# Allegro board FPMEMORY.brd
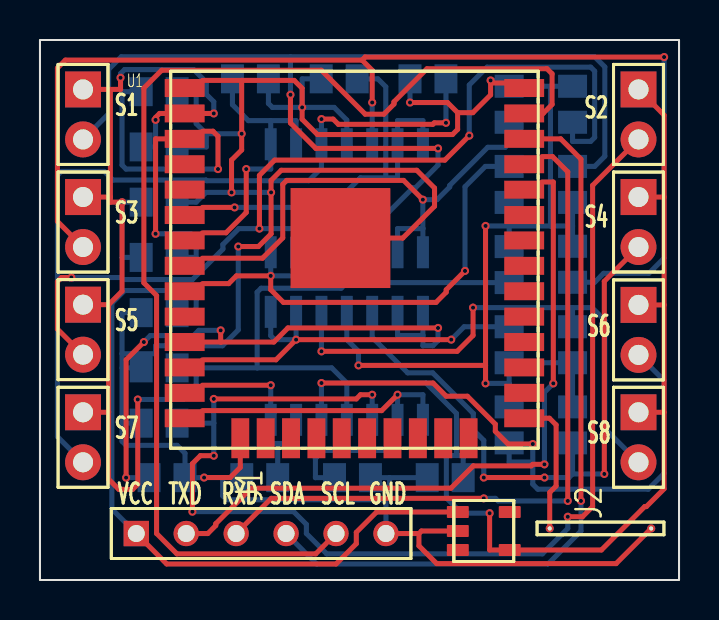
[diagram p0: board, top side]
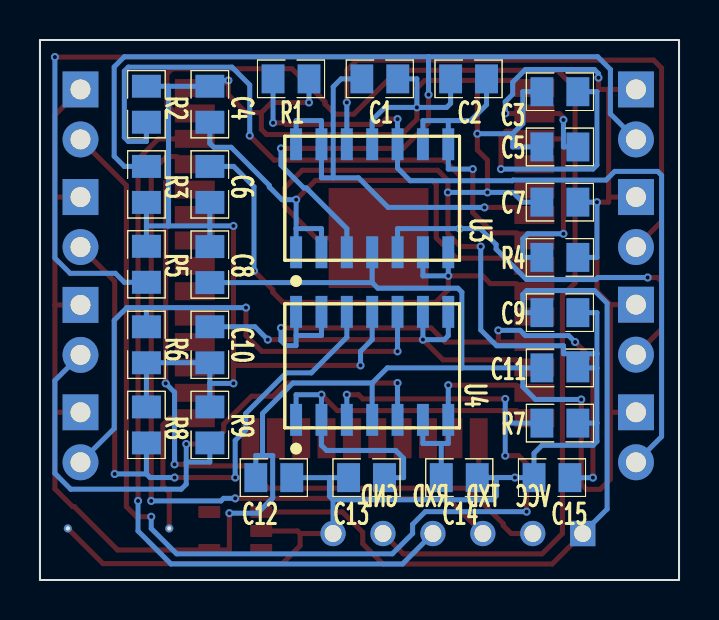
[diagram p1: board, bottom side, seen from below]

Outline 32 x 27 mm; copper layers: TOP, BOTTOM. Coordinates in mm from the lower left corner of the outline.
Outline path: rectangle 0,0 32,27

## Design rules (mm)
constraint set DEFAULT: min track width 0.254, pair gap 0.254

## Placement (name value [footprint] x y rotation side)
C1  0.1uF  [CAP0805]  14.98 25.06 0 bottom
C2  0.1uF  [CAP0805]  10.54 25.06 0 bottom
C3  0.1uF  [CAP0805]  5.97 24.42 180 bottom
C4  0.1uF  [CAP0805]  23.49 23.79 270 bottom
C5  10uF  [CAP0805]  5.97 21.65 180 bottom
C6  0.1uF  [CAP0805]  23.49 19.78 270 bottom
C7  0.1uF  [CAP0805]  5.97 18.89 180 bottom
C8  0.1uF  [CAP0805]  23.49 15.77 90 bottom
C9  1uF  [CAP0805]  5.97 13.37 180 bottom
C10  0.1uF  [CAP0805]  23.49 11.76 270 bottom
C11  2.2uF  [CAP0805]  5.97 10.61 180 bottom
C12  0.1uF  [CAP0805]  20.29 5.12 180 bottom
C13  0.1uF  [CAP0805]  15.65 5.12 180 bottom
C14  0.1uF  [CAP0805]  11 5.12 180 bottom
C15  0.1uF  [CAP0805]  6.36 5.12 180 bottom
J1  UART  [SIP-6]  4.82 2.32 90 top
J2  CON2  [SIP-2S]  25.52 2.58 90 top
R1  50k  [RES0805]  19.43 25.06 180 bottom
R2  50k  [RES0805]  26.67 23.79 270 bottom
R3  50k  [RES0805]  26.67 19.78 270 bottom
R4  10k  [RES0805]  5.97 16.13 180 bottom
R5  50k  [RES0805]  26.67 15.79 90 bottom
R6  50k  [RES0805]  26.67 11.76 270 bottom
R7  50k  [RES0805]  5.97 7.84 180 bottom
R8  50k  [RES0805]  26.67 7.75 90 bottom
R9  50k  [RES0805]  23.49 7.75 270 bottom
S1  IMS-C20B  [SIP-2]  2.16 24.53 0 top
S2  IMS-C20B  [SIP-2]  29.97 24.53 0 top
S3  IMS-C20B  [SIP-2]  2.16 19.15 0 top
S4  IMS-C20B  [SIP-2]  29.97 19.15 0 top
S5  IMS-C20B  [SIP-2]  2.16 13.77 0 top
S6  IMS-C20B  [SIP-2]  29.97 13.75 0 top
S7  IMS-C20B  [SIP-2]  2.16 8.39 0 top
S8  IMS-C20B  [SIP-2]  29.97 8.39 0 top
U1  ESP32  [SMD-38]  15.75 19.09 0 top
U2  TPS70933  [SOT-23]  22.22 2.45 0 top
U3  LM324  [SOIC-14]  15.36 19.09 90 bottom
U4  LM324  [SOIC-14]  15.36 10.71 90 bottom

## Library data of the parts
C1-C15 = CAP NP
J1 = UART
J2 = CON2
R1-R9 = R
S1-S8 = IMS-C20B
U1 = ESP32
U2 = TPS70933
U3 U4 = LM324

## Footprints (pads in the part's own frame, mm; a bottom-side part is the same pattern mirrored in y, then rotated)
CAP0805
  rect 1.15x1.45 smd: 1(-0.9,0) 2(0.9,0)
RES0805
  rect 1.15x1.45 smd: 1(-0.9,0) 2(0.9,0)
SIP-2
  rect 1.8x1.8 hole 1: 1(0,0)
  round 1.8 hole 1: 2(0,-2.5)
SIP-2S
  round 0.406 hole 0.203: 1(0,0) 2(0,-5.08)
SIP-6
  rect 1.27x1.27 hole 0.85: 1(0,0)
  round 1.27 hole 0.85: 2(0,-2.5) 3(0,-5) 4(0,-7.5) 5(0,-10) 6(0,-12.5)
SMD-38
  rect 2x0.9 smd: 1(-8.5,5.51) 2(-8.5,4.24) 3(-8.5,2.97) 4(-8.5,1.7) 5(-8.5,0.43) 6(-8.5,-0.84) 7(-8.5,-2.11) 8(-8.5,-3.38) 9(-8.5,-4.65) 10(-8.5,-5.92) 11(-8.5,-7.19) 12(-8.5,-8.46) 13(-8.5,-9.73) 14(-8.5,-11) 25(8.5,-11) 26(8.5,-9.73) 27(8.5,-8.46) 28(8.5,-7.19) 29(8.5,-5.92) 30(8.5,-4.65) 31(8.5,-3.38) 32(8.5,-2.11) 33(8.5,-0.84) 34(8.5,0.43) 35(8.5,1.7) 36(8.5,2.97) 37(8.5,4.24) 38(8.5,5.51)
  rect 0.9x2 smd: 15(-5.715,-12) 16(-4.445,-12) 17(-3.175,-12) 18(-1.905,-12) 19(-0.635,-12) 20(0.635,-12) 21(1.905,-12) 22(3.175,-12) 23(4.445,-12) 24(5.715,-12)
  rect 5x5 smd: 39(-0.7,-1.99)
SOIC-14
  rect 1.6x0.6 smd: 1(-2.7,3.81) 2(-2.7,2.54) 3(-2.7,1.27) 4(-2.7,0) 5(-2.7,-1.27) 6(-2.7,-2.54) 7(-2.7,-3.81) 8(2.7,-3.81) 9(2.7,-2.54) 10(2.7,-1.27) 11(2.7,0) 12(2.7,1.27) 13(2.7,2.54) 14(2.7,3.81)
SOT-23
  rrect 1.1x0.6 smd: 1(-1.3,0.95) 2(-1.3,0) 3(-1.3,-0.95) 4(1.3,-0.95) 5(1.3,0.95)

## Nets
GND: C1.1 C2.2 C3.1 C4.1 C5.1 C6.2 C7.1 C8.2 C9.2 C10.2 C11.2 C12.2 C13.1 C14.2 C15.1 J1.6 J2.2(P2) R1.2 R2.1 R3.2 R5.2 R6.2 R7.2 R8.2 R9.1 U1.1 U1.15 U1.38 U1.39 U2.2 U3.11 U4.11
VCC: C9.1 J1.1(VCC) U2.1
VDD33: C5.2 C7.2 C8.1 C11.1 C12.1 R4.2 S1.1 S2.1 S3.1 S4.1 S5.1 S6.1 S7.1 S8.1 U1.2 U2.4(OUT) U3.4(VCC) U4.4(VCC)
ADC1_CH4: C4.2 U1.8 U3.1 U3.2
ADC1_CH5: C6.1 U1.9 U3.6 U3.7
ADC1_CH6: C1.2 U1.6 U3.13 U3.14
ADC1_CH7: C2.1 U1.7 U3.8 U3.9
ADC2_CH5: C13.2 U1.14 U4.1 U4.2
ADC2_CH6: C14.1 U1.13 U4.6 U4.7
ADC2_CH7: C10.1 U1.12 U4.8 U4.9
ADC2_CH9: C15.2 U1.11 U4.13 U4.14
RXD: J1.3 U1.35(TXD0)
SCL: J1.5 U1.37
SDA: J1.4 U1.36
TXD: J1.2 U1.34
N01133: R3.1 S1.2(-) U3.3
N02072: R2.2 S5.2(-) U3.5
N02980: R5.1 S3.2(-) U3.12
N03024: R1.1 S7.2(-) U3.10
N05883: C3.2 R4.1 U1.3
N05919: J2.1 U1.25
N44841: R7.1 S2.2(-) U4.3
N44913: R8.1 S4.2(-) U4.12
N45127: R9.2 S6.2(-) U4.5
N45143: R6.1 S8.2(-) U4.10

Pads without a net: U1 4 5 10 16 17 18 19 20 21 22 23 24 26 27 28 29 30 31 32 33; U2 3 5

## Via types
v1: diameter 0.406, hole 0.203, TOP to BOTTOM, 58 vias

## Routing (per net, layer and track width the routed paths; a pad name or vN(x,y) marks a point on that pad's centre or on a via; arc(x,y) is an arc through that point)
GND: length 179.7
  TOP w0.254: 18.98,2.32 19.1,2.45 U2.2 ; 18.98,2.32 18.98,1.71 19.86,0.82 28.85,0.82 J2.2 ; 18.98,2.32 J1.6 ; 20.91,23.37 20.91,22.53 20.66,22.27 13.89,22.27 13.13,23.04 v1(13.13,23.63) 13.13,24.58 12.73,24.98 10.1,24.98 ; 20.91,23.37 20.41,23.87 v1(18.53,23.87) ; 20.91,23.37 21.68,23.37 22.56,24.26 22.56,24.85 ; 22.31,10.73 v1(22.31,9.83) ; 22.31,10.73 v1(15.95,10.73) ; 22.31,10.73 v1(22.31,17.7) ; U1.38 24.25,24.85 22.56,24.85 ; 10.1,24.98 v1(10.1,22.31) 10.1,21.5 9.59,21 v1(9.59,19.38) ; 10.1,24.98 8.13,24.98 ; 22.56,24.85 v1(22.56,24.98) ; U1.15 10.03,5.63 9.52,5.12 v1(8.22,5.12) ; U1.39 18.17,17.1 19.76,18.69 19.76,19.6 18.87,20.49 12.08,20.49 11.57,19.98 v1(11.57,19.38) 11.57,17.31 10.94,16.67 v1(9.93,16.67)
  BOTTOM w0.254: 4.11,10.61 4.11,11.31 ; 4.11,10.61 4.11,7.84 ; 4.11,10.61 C11.2 ; 4.11,11.31 5.79,11.31 5.79,11.71 9.14,11.71 9.93,12.51 v1(9.93,16.67) ; 4.11,11.31 4.11,13.37 C9.2 ; 17.32,4.01 9.35,4.01 9.15,4.21 9.15,5.12 ; 17.32,4.01 J1.6 ; 17.32,4.01 17.5,4.19 17.5,5.12 ; 25.56,24.69 25.56,17.7 ; 25.56,24.69 R2.1 ; 25.56,24.69 C4.1 23.49,24.98 v1(22.56,24.98) ; 25.56,17.7 23.49,17.7 ; 25.56,17.7 26.67,17.7 ; 23.49,9.83 R9.1 ; 23.49,9.83 v1(22.31,9.83) ; 23.49,9.83 C10.2 R6.2 R8.2 ; v1(13.13,23.63) 11.64,23.63 11.44,23.83 C2.2 ; v1(13.13,23.63) 13.13,25.06 C1.1 ; v1(13.13,23.63) 14.73,23.63 15.36,22.99 15.36,21.79 ; 8.33,22.31 7.82,22.82 7.82,24.42 C3.1 ; 8.33,22.31 8.33,21.65 C5.1 ; 8.33,22.31 v1(10.1,22.31) ; 15.36,13.41 15.36,12.02 15.95,11.43 v1(15.95,10.73) ; C6.2 23.49,17.7 ; 23.49,17.7 C8.2 ; 23.49,17.7 v1(22.31,17.7) ; 9.15,5.12 9.14,5.12 v1(8.22,5.12) 8.02,5.12 8.01,5.12 C15.1 7.26,6.34 6.86,6.73 4.31,6.73 4.11,6.93 4.11,7.84 ; 9.15,5.12 C14.2 ; C7.1 7.82,18.89 8.31,19.38 v1(9.59,19.38) v1(11.57,19.38) ; 26.67,17.7 R5.2 ; 26.67,17.7 R3.2 ; 17.5,5.12 C12.2 ; 17.5,5.12 C13.1 ; 4.11,7.84 R7.2 ; R1.2 v1(18.53,23.87)
VCC: length 36.6
  TOP w0.254: J1.1 6.35,0.8 14.82,0.8 15.84,1.82 15.84,2.39 16.86,3.4 U2.1
  BOTTOM w0.254: J1.1 3.6,3.55 3.6,13.84 4.24,14.47 7.62,14.47 7.82,14.28 7.82,13.37 C9.1
VDD33: length 133.1
  TOP w0.254: S3.1 3.53,19.15 ; 3.53,19.15 3.53,18.89 v1(4.11,18.89) 4.11,14.44 3.44,13.77 ; 3.53,19.15 3.53,24.53 ; 31.25,19.15 31.25,23.25 S2.1 ; 31.25,19.15 S4.1 ; 31.25,19.15 31.25,13.75 ; 3.44,13.77 3.44,8.39 ; 3.44,13.77 S5.1 ; v1(4.03,25.11) 4.03,24.53 3.53,24.53 ; v1(8.7,23.33) U1.2 5.99,23.33 5.79,23.12 v1(5.79,23.01) ; S7.1 3.44,8.39 ; 3.44,8.39 3.44,5.04 3.95,4.53 4.64,4.53 4.9,4.79 v1(4.9,9.03) ; S6.1 31.25,13.75 ; 31.25,13.75 31.25,8.39 ; 3.53,24.53 S1.1 ; v1(22.51,3.34) 22.51,1.5 U2.4 28.11,1.5 30.28,3.67 30.36,3.67 31.25,4.56 31.25,8.39 ; 31.25,8.39 S8.1
  BOTTOM w0.254: C5.2 5.79,21.65 v1(5.79,23.01) ; C11.1 7.82,10.61 ; 7.82,10.61 7.82,9.66 7.19,9.03 v1(4.9,9.03) ; 7.82,10.61 10.87,10.61 ; C8.1 15.36,14.87 ; 15.36,14.87 U3.4 ; 15.36,14.87 15.08,14.59 11.07,14.59 10.87,14.39 10.87,10.61 ; 20.85,6.22 20.85,8.32 19.33,9.85 15.36,9.85 ; 20.85,6.22 20.35,6.22 20.35,4.1 21.11,3.34 v1(22.51,3.34) ; 20.85,6.22 21.19,6.22 C12.1 ; v1(8.7,23.33) 8.7,23.91 8.33,24.28 8.33,24.89 7.7,25.52 4.24,25.52 4.03,25.32 v1(4.03,25.11) ; 15.36,9.85 14.61,10.61 10.87,10.61 ; 15.36,9.85 U4.4 ; C7.2 v1(4.11,18.89) 4.11,16.13 R4.2
ADC1_CH4: length 26.3
  TOP w0.254: v1(19.17,19.02) 18.21,19.98 12.36,19.98 12.16,19.78 12.16,17.11 11.14,16.09 8.13,16.09
  BOTTOM w0.254: C4.2 23.49,21.83 23.29,21.63 22.42,21.63 20.52,19.73 20.52,19.65 19.88,19.02 v1(19.17,19.02) 19.17,17.57 ; U3.1 19.17,17.57 19.17,17.57 ; 19.17,17.57 17.9,17.57 U3.2
ADC1_CH5: length 25.5
  TOP w0.254: 8.13,14.82 9.45,14.82 9.84,15.21 v1(11.55,15.21) 11.55,14.52 12.19,13.88 19.83,13.88 20.34,14.39 20.34,14.51 v1(21.28,15.46)
  BOTTOM w0.254: C6.1 22.3,20.68 21.28,19.66 v1(21.28,15.46) ; U3.6 12.82,15.21 v1(11.55,15.21) U3.7
ADC1_CH6: length 21.8
  TOP w0.254: v1(9.74,18.63) 8.13,18.63
  BOTTOM w0.254: C1.2 16.92,25.06 17.32,24.66 17.32,20.11 ; 17.32,20.11 17.9,20.11 17.9,22.97 19.17,22.97 U3.14 ; 17.32,20.11 16.05,20.11 14.57,18.63 v1(9.74,18.63)
ADC1_CH7: length 14.4
  TOP w0.254: 8.13,17.36 9.31,17.36 10.33,18.38 v1(10.33,20.55)
  BOTTOM w0.254: 11.55,22.97 12.82,22.97 U3.9 ; 11.55,22.97 U3.8 11.55,20.55 v1(10.33,20.55) ; 11.55,22.97 10.43,22.97 9.64,23.76 C2.1
ADC2_CH5: length 21.5
  TOP w0.254: v1(17.9,9.26) 17.11,8.47 8.13,8.47
  BOTTOM w0.254: C13.2 13.79,5.12 13.79,6.08 14.19,6.48 17.65,6.48 17.9,6.73 U4.2 v1(17.9,9.26) 19.17,9.26 U4.1
ADC2_CH6: length 10.5
  TOP w0.254: v1(11.55,9.74) 8.13,9.74
  BOTTOM w0.254: 11.9,6.83 12.82,6.83 U4.6 ; 11.9,6.83 11.55,6.83 U4.7 v1(11.55,9.74) ; 11.9,6.83 C14.1
ADC2_CH7: length 20
  TOP w0.254: v1(20.59,12.02) v1(12.82,12.02) 11.82,11.01 8.13,11.01
  BOTTOM w0.254: U4.9 v1(12.82,12.02) 11.75,12.02 11.55,12.22 U4.8 ; C10.1 21.24,12.66 v1(20.59,12.02)
ADC2_CH9: length 31.6
  TOP w0.254: 9.05,11.9 v1(9.05,12.48) ; 9.05,11.9 U1.11 ; 9.05,11.9 11.71,11.9 12.42,12.6 v1(19.93,12.6) ; v1(5.2,11.9) 4.31,11.01 v1(4.31,5.12)
  BOTTOM w0.254: v1(19.93,12.6) 19.93,11.97 19.68,11.72 19.17,11.72 19.17,12.23 ; 19.17,12.23 17.9,12.23 17.9,13.41 ; 19.17,12.23 U4.14 ; v1(9.05,12.48) 7.95,12.48 7.69,12.22 5.52,12.22 v1(5.2,11.9) ; C15.2 v1(4.31,5.12)
RXD: length 35.4
  TOP w0.254: J1.3 11.58,4.08 v1(22.22,4.08) ; 25.14,21.17 25.67,21.17 26.43,20.41 v1(26.43,3.95)
  BOTTOM w0.254: v1(26.43,3.95) 22.93,3.95 22.81,4.08 v1(22.22,4.08)
SCL: length 58.3
  TOP w0.254: J1.5 13.81,1.31 6.86,1.31 5.84,2.32 5.84,14.22 5.2,14.86 5.2,24.6 6.09,25.49 14.09,25.49 16.29,23.29 17.22,23.29 17.73,23.8 17.73,23.91 19.38,25.56 25.39,25.56 25.64,25.31 25.64,23.78 25.19,23.33 U1.37
SDA: length 37.9
  TOP w0.254: U1.36 26.07,22.06 27.09,21.04 v1(27.09,3.95)
  BOTTOM w0.254: J1.4 13.85,0.8 25.44,0.8 27.09,2.45 v1(27.09,3.95)
TXD: length 34.3
  TOP w0.254: 25.14,19.9 25.7,19.9 v1(25.7,9.83) ; J1.2 8.41,2.32 8.8,2.72 8.8,2.81 10.58,4.59 20.58,4.59 21.7,5.71 24.6,5.71 24.68,5.78 v1(25.26,5.78)
  BOTTOM w0.254: v1(25.7,9.83) 25.26,9.39 v1(25.26,5.78)
N01133: length 53.5
  TOP w0.254: v1(12.54,24.26) 12.54,22.85 13.81,21.58 v1(19.93,21.58)
  BOTTOM w0.254: 12.54,26.16 27.77,26.16 28.28,25.66 28.28,21.19 27.77,20.68 R3.1 ; 12.54,26.16 v1(12.54,24.26) ; 12.54,26.16 4.07,26.16 3.44,25.53 3.44,23.31 S1.2 ; v1(19.93,21.58) 19.93,20.74 18.79,19.6 18.67,19.6 16.63,17.57 16.63,16.39
N02072: length 48.6
  TOP w0.254: v1(10.99,17.57) 10.99,20.23 11.75,21 20.27,21 v1(21.5,22.22) ; v1(1.57,15.12) 1.08,15.12 0.88,14.92 0.88,12.55 S5.2
  BOTTOM w0.254: v1(1.57,15.12) 4.06,15.12 4.16,15.02 7.64,15.02 9.16,16.55 9.16,16.78 9.95,17.57 v1(10.99,17.57) 14.09,17.57 14.09,16.39 ; R2.2 26.67,21.93 27.58,21.93 27.77,22.13 27.77,25.44 27.58,25.64 22.39,25.64 21.5,24.75 v1(21.5,22.22)
N02980: length 59.6
  TOP w0.254: v1(31.25,26.15) 16.28,26.15 16.13,26 ; v1(16.63,23.87) 16.63,25.49 16.13,26 ; S3.2 0.88,17.93 0.88,25.6 1.27,26 16.13,26
  BOTTOM w0.254: R5.1 27.77,14.89 28.22,15.33 30.49,15.33 31.25,16.1 v1(31.25,26.15) ; U3.12 v1(16.63,23.87)
N03024: length 39.7
  TOP w0.254: v1(14.09,23.05) 14.68,23.05 14.94,22.78 19.67,22.78 19.74,22.86 v1(20.33,22.86)
  BOTTOM w0.254: v1(14.09,23.05) U3.10 14.09,20.6 13.46,19.96 8.35,19.96 8.31,20 3.65,20 3.22,20.43 1.07,20.43 0.88,20.23 0.88,7.17 S7.2 ; R1.1 v1(20.33,22.86)
N05883: length 22.3
  TOP w0.254: U1.3 5.79,22.06 v1(5.79,17.31) ; 8.13,22.44 8.66,22.44 8.92,22.19 v1(8.92,20.55)
  BOTTOM w0.254: v1(8.92,20.55) 4.31,20.55 4.11,20.75 4.11,24.42 C3.2 ; R4.1 7.82,16.13 7.82,17.06 7.57,17.31 v1(5.79,17.31)
N05919: length 7
  TOP w0.254: U1.25 25.51,8.09 25.84,7.76 25.84,4.7 25.52,4.38 J2.1
N44841: length 59.4
  TOP w0.254: v1(8.7,9.05) 15.84,9.05 16.05,9.26 v1(16.63,9.26) ; v1(7.63,3.42) 7.63,5.82 8.03,6.22 v1(8.7,6.22) ; S2.2 27.67,19.73 27.67,3.67 27.16,3.16 v1(26.43,3.16)
  BOTTOM w0.254: v1(26.43,3.16) 26.43,2.58 25.16,1.31 14.36,1.31 13.34,2.32 13.34,2.78 12.71,3.42 v1(7.63,3.42) ; 16.63,8.01 v1(16.63,9.26) ; 8.7,7.84 v1(8.7,9.05) ; 8.7,7.84 R7.1 ; 8.7,7.84 v1(8.7,6.22)
N44913: length 31
  TOP w0.254: v1(22.22,5.12) v1(25.26,5.12) ; S4.2 28.26,14.93 v1(28.26,5.3)
  BOTTOM w0.254: U4.12 16.63,12.13 18.41,10.36 19.67,10.36 21.7,8.32 21.7,7.5 22.22,6.98 v1(22.22,5.12) ; v1(25.26,5.12) 26.49,5.12 26.67,5.3 ; 26.67,5.3 v1(28.26,5.3) ; 26.67,5.3 R8.1
N45127: length 31.5
  TOP w0.254: v1(14.09,9.85) 19.68,9.85 20.34,9.19 21.4,9.19 22.8,7.79 22.8,7.43 23.44,6.8 v1(24.68,6.8)
  BOTTOM w0.254: 24.68,5.9 23.49,5.9 R9.2 ; 24.68,5.9 24.68,4.79 24.93,4.54 30.46,4.54 31.25,5.33 31.25,9.97 S6.2 ; 24.68,5.9 v1(24.68,6.8) ; 14.09,8.01 v1(14.09,9.85)
N45143: length 26.9
  TOP w0.254: v1(21.68,13.62) 21.68,12.23 20.89,11.43 v1(14.09,11.43)
  BOTTOM w0.254: U4.10 v1(14.09,11.43) ; S8.2 28.28,7.57 28.28,12.98 27.65,13.62 26.67,13.62 ; 26.67,13.62 R6.1 ; 26.67,13.62 v1(21.68,13.62)

## Text on the board
Ref Des/Silkscreen Bottom: VCC | TXD | RXD | GND
Ref Des/Silkscreen Top: VCC | TXD | RXD | SDA | SCL | GND
NCLEGEND-1-2: FIGURE | FINISHED_SIZE | 39.37 | 8.0 | DRILL CHART: TOP to BOTTOM | ALL UNITS ARE IN MILS | PLATED | QTY | 20 | 50
